# Altium PCB PCB1.PcbDoc
Units mm, origin at the board's own origin, x right, y up, seen from the top; angles counter-clockwise.
Board outline 71.5 x 84.25 mm, 2 copper layers (Top Layer, Bottom Layer), stack 1.569 mm thick; 17 components, 13 nets, 65 pads, 4 vias.
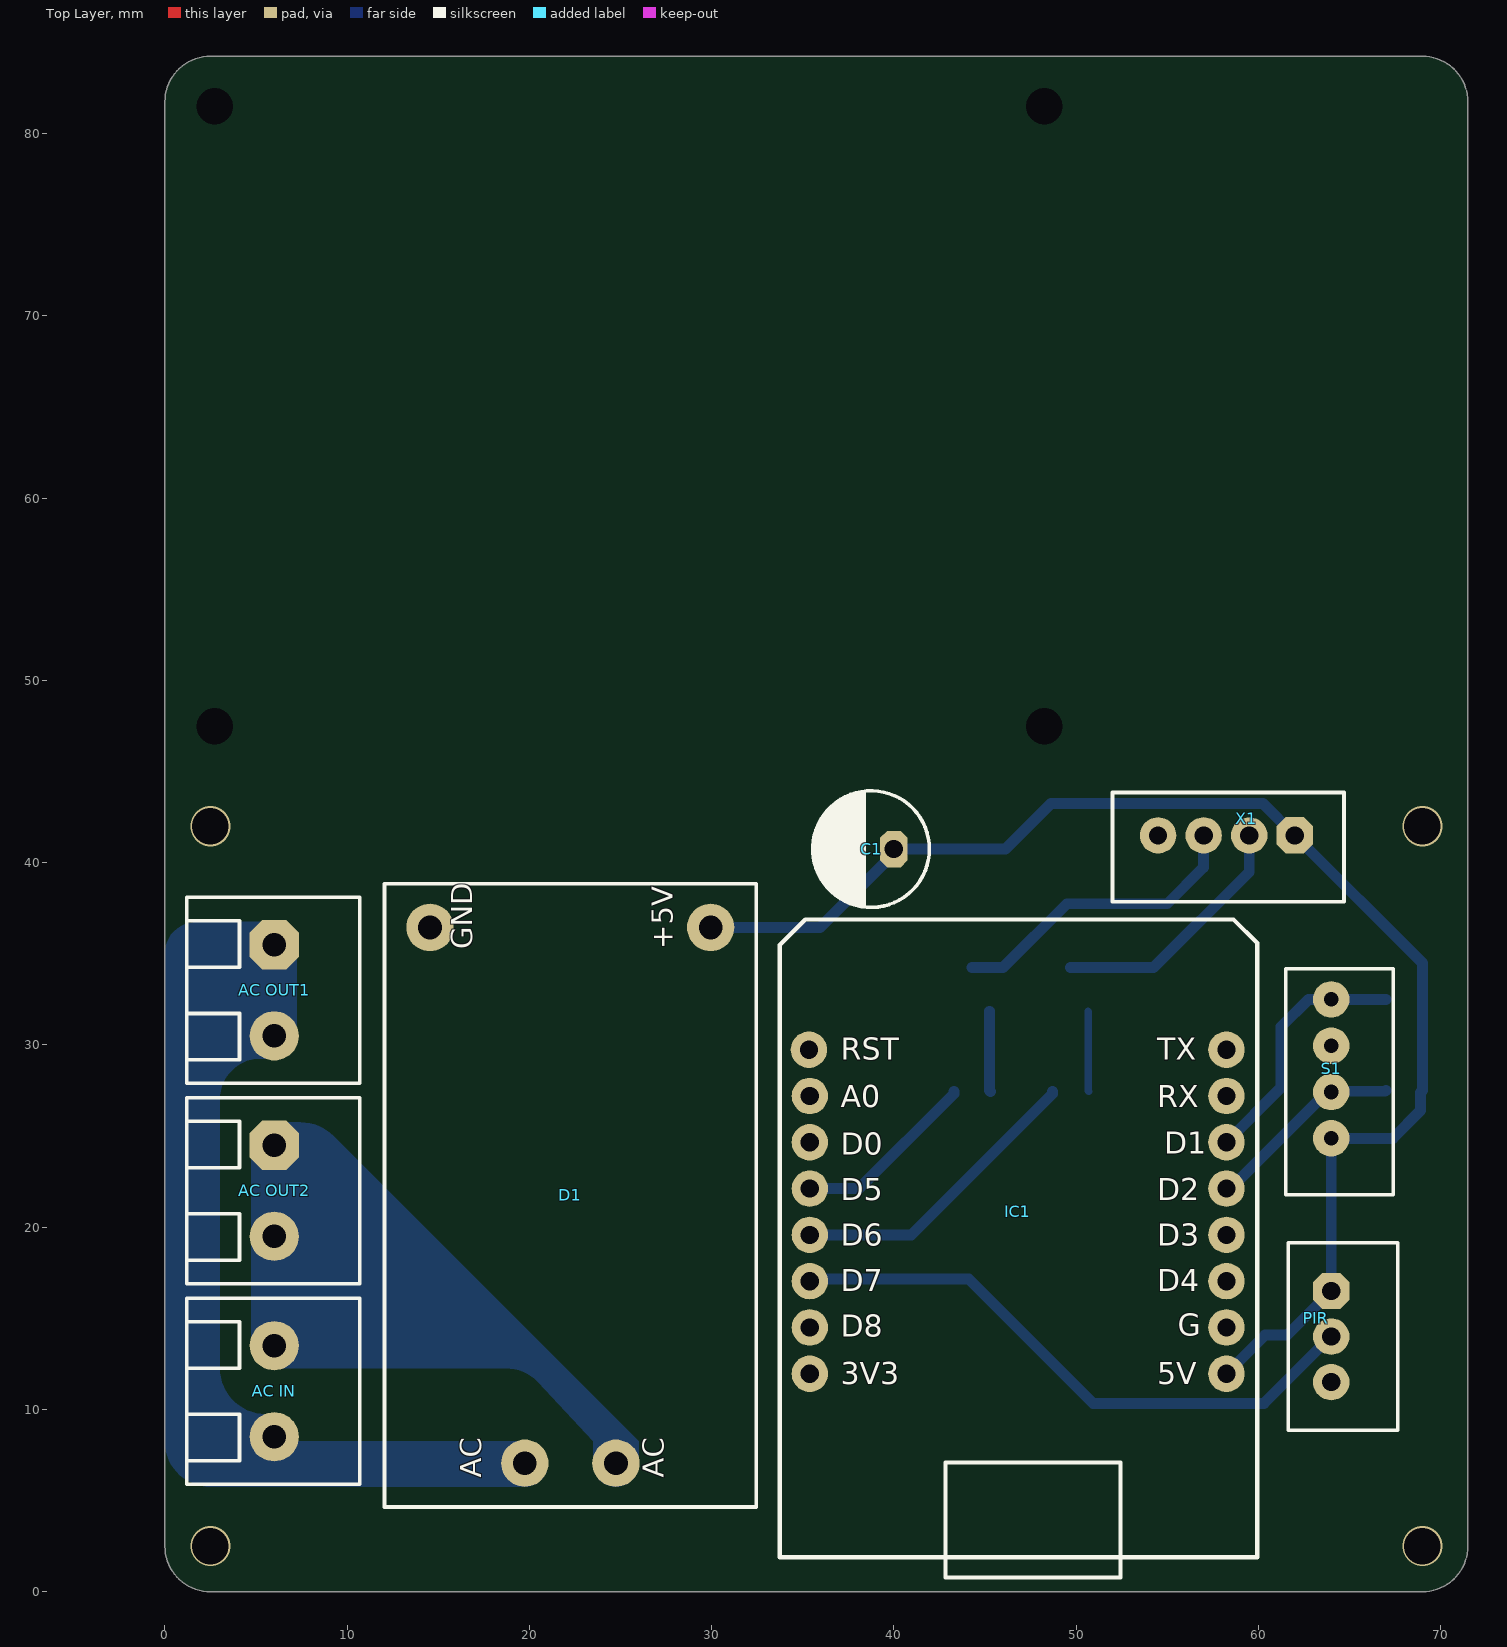
[diagram p0: Top Layer view]
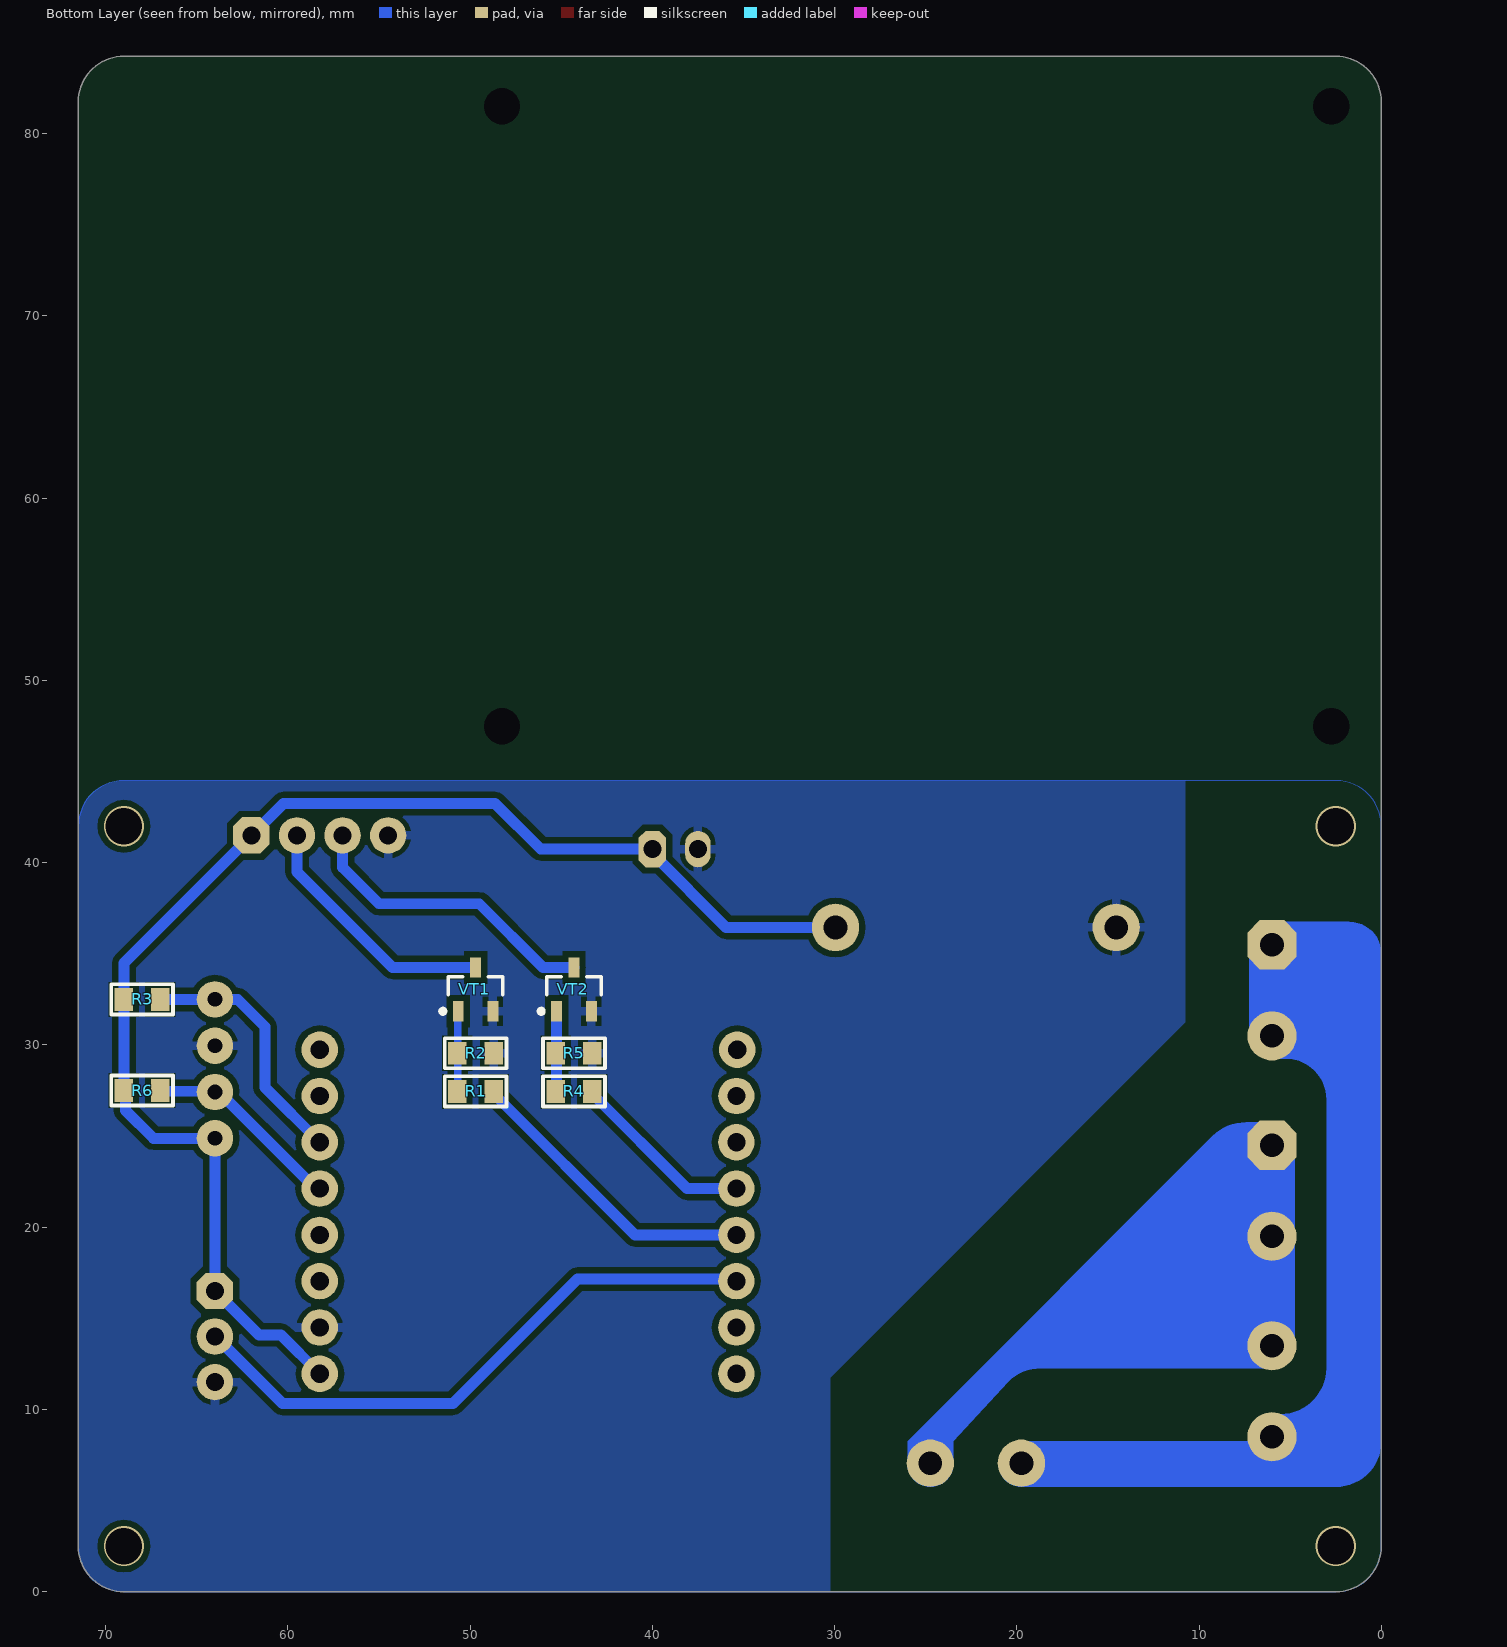
[diagram p1: Bottom Layer view, seen from below]
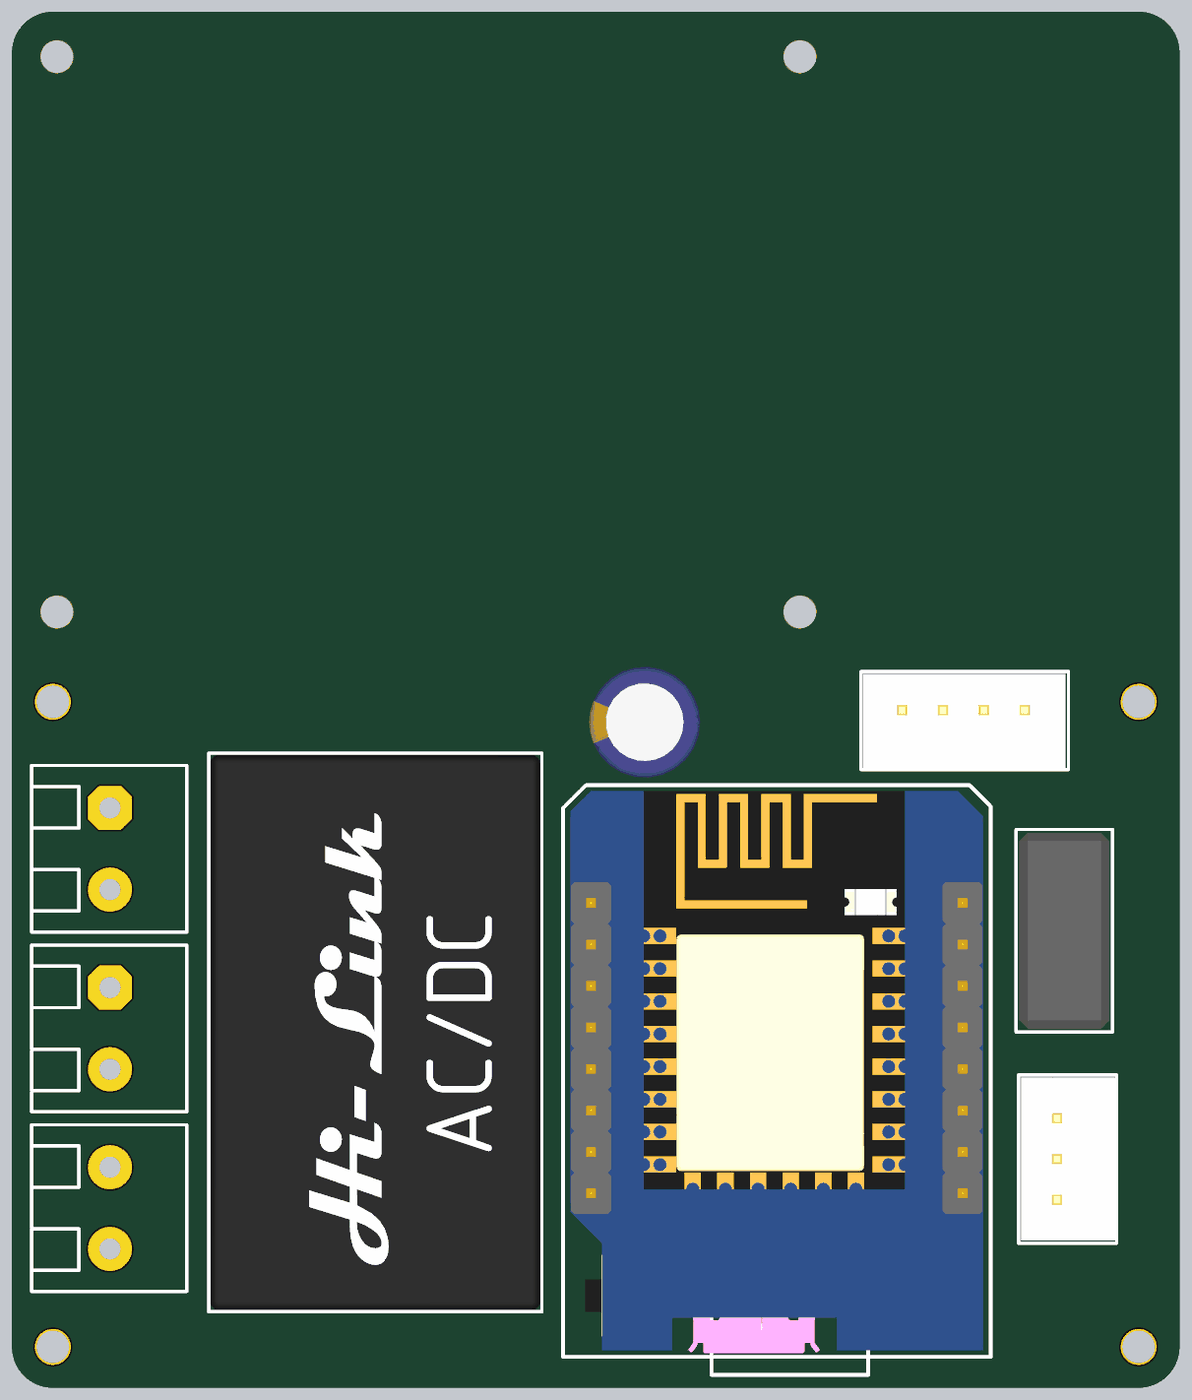
[diagram p2: 3D render of the assembled board from above, using the file's embedded part models]
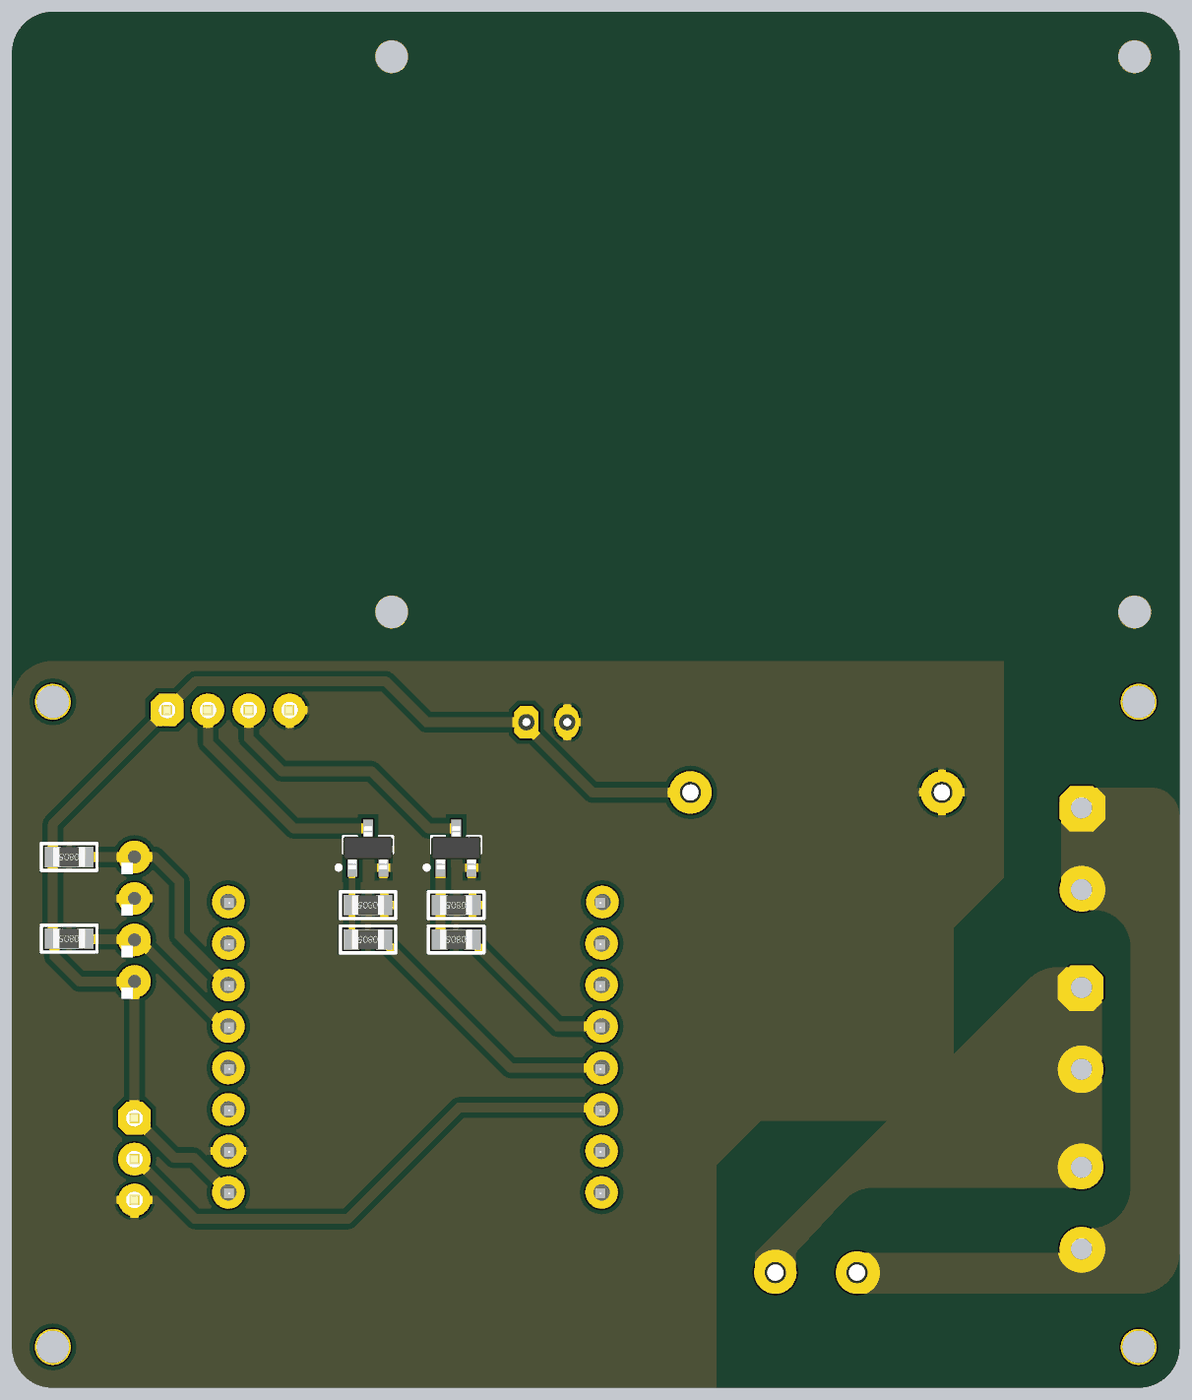
[diagram p3: 3D render of the assembled board from below, using the file's embedded part models]

## Layer stack, top to bottom
Top Solder: solder mask 0.0254, SM-001, Dk 4
Top Layer: signal copper 0.035
Dielectric 1: core 1.4986, Core-043, Dk 4.3
Bottom Layer: signal copper 0.035
Bottom Solder: solder mask 0.0254, SM-001, Dk 4

## Board outline
0,2.5 0,81.75 cw(c2.5,81.75) 2.5,84.25 69,84.25 cw(c69,81.75) 71.5,81.75 71.5,2.5 cw(c69,2.5) 69,0 2.5,0 cw(c2.5,2.5)

## Design rules (kind name [scope] priority, off if disabled: settings)
Clearance "High Voltage" [All vs InNetClass('AC')] p1: gap=1.4 ignorepadtopadclearanceinfootprint=FALSE
Clearance [All] p2: gap=0.33 ignorepadtopadclearanceinfootprint=FALSE
Height [All] p1: minheight=0 maxheight=50 prefheight=12.7
PolygonConnect [All] p1: connectstyle=Relief reliefconductorwidth=0.5 reliefentries=4 polygonreliefangle="90 Angle" airgapwidth=0.254
RoutingVias [All] p1: holewidth=0.711 width=1.27 viastyle="Through Hole" minholewidth=0.711 minwidth=1.27 maxholewidth=0.711 maxwidth=1.27
SolderMaskExpansion [All] p1: expansion=0.102 istentingtop=FALSE
Width [All] p1: maxlimit=1.2 minlimit=0.254 preferedwidth=0.3 minimp=50.000000 maximp=50.000000 favimp=50.000000
29 further rules are at their usual default settings.

## Classes and differential pairs
net class AC: AC1 AC2

## Components (designator, comment, footprint, x,y, rotation, side; value= is the part's Value field where it differs from the comment)
"AC IN" "Terminal connector, 2pin, 3.5mm, 300VAC, 10A" "CON: 0395430002 (5 mm)"#1 6,11 r270 top
"AC OUT1" "Terminal connector, 2pin, 3.5mm, 300VAC, 10A" "CON: 0395430002 (5 mm)"#2 6,33 r270 top
"AC OUT2" "Terminal connector, 2pin, 3.5mm, 300VAC, 10A" "CON: 0395430002 (5 mm)"#2 6,22 r270 top
C1 "Aluminium capacitor, 10μF, 25V, ±20%, 54mOhm, 14x10x5 mm, -55...+105°C" "CAP: D6.3C2.5H11" 38.75,40.75 r180 top value=10μF
D1 "AC/DC converter, isolator, 3V 900mA, 100...240VAC, -40...+105°C, 30x20x15mm" "MOD: HLK-PM01" 22.25,21.75 r90 top
IC1 "D1 mini" D1_mini 46.84,19.29 r0 top
PIR "Connector, 2pin, 2.54mm, 250VAC, 3A" "CON: CWF-3" 64,14 r270 top
R1 "Resistor film, 102, ±5%, 0805, 0.125W, -55...+125°C" "RES: 0805" 49.7,27.45 r0 bottom value=102
R2 "Resistor film, 103, ±5%, 0805, 0.125W, -55...+125°C" "RES: 0805" 49.7,29.55 r0 bottom value=103
R3 "Resistor film, 103, ±5%, 0805, 0.125W, -55...+125°C" "RES: 0805" 68,32.5 r0 bottom value=103
R4 "Resistor film, 102, ±5%, 0805, 0.125W, -55...+125°C" "RES: 0805" 44.3,27.45 r0 bottom value=102
R5 "Resistor film, 103, ±5%, 0805, 0.125W, -55...+125°C" "RES: 0805" 44.3,29.55 r0 bottom value=103
R6 "Resistor film, 103, ±5%, 0805, 0.125W, -55...+125°C" "RES: 0805" 68,27.5 r0 bottom value=103
S1 "AM2320" AM2320 64,24.88 r90 top
VT1 "NPN transistor, 45V, 100mA, 100MHz, 300mW, 0.6V, 420, SOT-23, -55...+125°C" SOT23 49.7,33.05 r90 bottom
VT2 "NPN transistor, 45V, 100mA, 100MHz, 300mW, 0.6V, 420, SOT-23, -55...+125°C" SOT23 44.3,33.05 r90 bottom
X1 "Connector, 4pin, 2.54mm, 250VAC, 3A" "CON: CWF-4" 64.75,43.875 r180 top

## Footprints (in the part's own frame and the unit in brackets; to place one, negate y for a bottom-side part, rotate by r counter-clockwise, add the part's x,y. Pads: shape width x height; smd on the part's side, far side on the other; paste and mask are expansions set on the pad)
AM2320 [mm]
  round 2 hole 0.8: 1(0,0) 2(2.54,0) 3(5.08,0) 4(7.62,0)
  silkscreen extent -3.1,-3.4 9.3,2.5, body extent -2.9,-3.2 9.1,2.3, height 15.75
"CAP: D6.3C2.5H11" [mm]
  oct 1.5x2 hole 1: 1(-1.25,0)
  oval 1.4x2 hole 1: 2(1.25,0)
  silkscreen extent -3.2,-3.2 3.2,3.2, body extent -3.4,-3.4 3.4,3.4, height 12.5
"CON: 0395430002 (5 mm)"#1 [mm] "2 pin 5.08mm screw connector"
  round 2.7 hole 1.3: 1(-2.5,0) 2(2.5,0)
  silkscreen extent -5.1,-4.8 5.1,4.7, body extent -5,-4.8 5,4.6, height 14.63
"CON: 0395430002 (5 mm)"#2 [mm] "2 pin 5.08mm screw connector"
  oct 2.7x2.7 hole 1.3: 1(-2.5,0)
  round 2.7 hole 1.3: 2(2.5,0)
  silkscreen extent -5.1,-4.8 5.1,4.7, body extent -5,-4.8 5,4.6, height 14.63
"CON: CWF-3" [mm]
  oct 2x2 hole 1: 1(-2.5,0)
  round 2 hole 1: 2(0,0) 3(2.5,0)
  round 0.5 on Mech1: ""(-4.5,-1.7)
  silkscreen extent -5.15,-2.35 5.15,3.65, body extent -5,-2.2 5,3.55, height 7
"CON: CWF-4" [mm]
  oct 2x2 hole 1: 1(2.75,2.375)
  round 2 hole 1: 2(5.25,2.375) 3(7.75,2.375) 4(10.25,2.375)
  round 0.5 on Mech1: ""(0.6,0.575)
  silkscreen extent 0.05,0.02 12.75,6.02, body extent 0.23,0.18 12.63,5.93, height 7
D1_mini [mm]
  round 2 hole 1: 1(-11.5,10.45) 2(-11.45,7.91) 3(-11.45,5.37) 4(-11.45,2.83) 5(-11.45,0.29) 6(-11.45,-2.25) 7(-11.45,-4.79) 8(-11.45,-7.33) 9(11.41,-7.33) 10(11.41,-4.79) 11(11.41,-2.25) 12(11.41,0.29) 13(11.41,2.83) 14(11.41,5.37) 15(11.41,7.91) 16(11.41,10.45)
  silkscreen extent -13.1,-18.5 13.1,17.6, body extent -12.65,-17.17 12.65,17.25, height 12.09
"MOD: HLK-PM01" [mm]
  round 2.6 hole 1.3: 1(-14.7,2.5) 2(-14.7,-2.5) 3(14.7,7.7) 4(14.7,-7.7)
  silkscreen extent -17.1,-10.2 17.1,10.2, body extent -17,-10.1 17,10.1, height 15.07
"RES: 0805" [mm]
  rect 1x1.25 smd: 1(-1,0) 2(1,0)
  silkscreen extent -1.7,-0.82 1.7,0.82, body extent -1,-0.6 1,0.6, height 0.44
SOT23 [mm]
  rect 1.1x0.6 smd: 1(-1.2,0.95) 2(-1.2,-0.95) 3(1.2,0)
  round 0.5 on Mech1: ""(-0.9,1.1)
  silkscreen extent -1.32,-1.5 0.7,1.92, body extent -1.32,-1.52 1.32,1.52, height 1.12

## Part data
"AC IN" "AC OUT1" "AC OUT2": library part Connector_terminal_2pin, CurrentMax=10A, Manufacturer=Degson, PartNumber=DG350-3.5-02P-14, VoltageMax=300VAC, CommentText="AC IN", HelpURL=https://www.chipdip.ru/product/dg350-3.5-02p-12, Multichannel=2pin, Pitch=3.5mm, TypeConnector="Terminal connector", ValueManufacturerPartNumber="Terminal connector, 2pin, 3.5mm, 300VAC, 10A"
C1: library part Aluminium, Manufacturer=Wurth, Package="14x10x5 mm", PartNumber=860080475013, Temperature=-55...+105°C, Tolerance=±20%, TypeCapacitor="Aluminium capacitor", Voltage=25V, HelpURL=https://www.digikey.com/product-detail/en/wurth-electronics-inc/860080475013/732-9029-1-ND/5728972, Impedance=54mOhm, ValueManufacturerPartNumber="Aluminium capacitor, 10μF, 25V, ±20%, 54mOhm, 14x10x5 mm, -55...+105°C"
D1: library part HLK-PM05, "AC/DC converter", InputVoltage=100...240VAC, Manufacturer=Mornsun, OutputVoltage="3V 900mA", Package=30x20x15mm, Temperature=-40...+105°C, ComponentType="AC/DC converter", HelpURL=https://ru.aliexpress.com/item/32408565688.html, OutputType=isolator, PartNumber=HLK-PM05, ValueManufacturerPartNumber="AC/DC converter, isolator, 3V 900mA, 100...240VAC, -40...+105°C, 30x20x15mm"
PIR: library part CWF-3, CurrentMax=3A, Manufacturer=Connfly, PartNumber=CWF-2R, VoltageMax=250VAC, CommentText="\"Разъем\"", HelpURL=https://www.chipdip.ru/product/cwf-2r-ds1069-2-mr, Multichannel=2pin, Pitch=2.54mm, TypeConnector=Connector, ValueManufacturerPartNumber="Connector, 2pin, 2.54mm, 250VAC, 3A"
R1 R2 R3 R4 R5 R6: library part Resistor_0805, Manufacturer=Yageo, Package=0805, PartNumber=RC0805JR-07100RL, Power=0.125W, Temperature=-55...+125°C, Tolerance=±5%, TypeResistor="Resistor film", HelpURL=https://www.digikey.com/product-detail/en/yageo/RC0805JR-07100RL/311-100ARCT-ND/731185
  R1 R4: ValueManufacturerPartNumber="Resistor film, 102, ±5%, 0805, 0.125W, -55...+125°C"
  R2 R3 R5 R6: ValueManufacturerPartNumber="Resistor film, 103, ±5%, 0805, 0.125W, -55...+125°C"
VT1 VT2: library part BJT_NPN_132, CurrentCE=100mA, CurrentGain=420, Frequency=100MHz, Manufacturer="ON Semiconductor", MaxPower=300mW, Package=SOT-23, PartNumber=KT3153A9, Temperature=-55...+125°C, VoltageCE=45V, VoltageSaturation=0.6V, HelpURL=https://www.digikey.com/product-detail/en/on-semiconductor/BC847CLT1G/BC847CLT1GOSCT-ND/917836, TypeTransistor="NPN transistor", ValueManufacturerPartNumber="NPN transistor, 45V, 100mA, 100MHz, 300mW, 0.6V, 420, SOT-23, -55...+125°C"
X1: library part CWF-4, CurrentMax=3A, Manufacturer=Connfly, PartNumber=CWF-4R, VoltageMax=250VAC, CommentText="\"Разъем\"", HelpURL=https://www.chipdip.ru/product/cwf-4r-ds1069-4-mr, Multichannel=4pin, Pitch=2.54mm, TypeConnector=Connector, ValueManufacturerPartNumber="Connector, 4pin, 2.54mm, 250VAC, 3A"

## Free pads (board coordinates)
  round 1.524 hole 2: 7(2.75,81.5) 8(2.75,47.5) 9(48.25,47.5) 10(48.25,81.5)

## Via types
v1: diameter 2.2, hole 2, Top Layer to Bottom Layer, 4 vias

## Nets (pads, with @x,y where several pads share a name; then routed paths per layer and width w, separated by ;. In a path a pad name is that pad's centre, name@x,y a point inside that pad or via, vN(x,y) a via of type N, cw(c..) or ccw(c..) an arc to the next point about the centre after c; other vN are vias at no path point)
+5: C1.1 D1.4 IC1.9 PIR.1 R3.2 R6.2 S1.1 X1.1 | length 75.3
  Bottom Layer w0.6: D1.4 35.95,36.45 40,40.5 C1.1 46.125,40.75 48.625,43.25 60.25,43.25 X1.1 69,34.5 R3.2 R6.2 68.901,27.401 68.901,26.401 67.38,24.88 S1.1 PIR.1 61.587,14.087 60.377,14.087 IC1.9
AC1: "AC IN.1" "AC OUT2.1" "AC OUT2.2" D1.2
AC2: "AC IN.2" "AC OUT1.1" "AC OUT1.2" D1.1
GND: C1.2 D1.3 IC1.10 PIR.3 R2.1 R5.1 S1.3 VT1.2 VT2.2 X1.4
NetR1_2: R1.2 R2.2 VT1.1 | length 4.4
  Bottom Layer w0.4: VT1.1 50.675,31.825 50.675,27.475 R1.2
NetR4_2: R4.2 R5.2 VT2.1 | length 4.4
  Bottom Layer w0.6: VT2.1 45.25,27.5 R4.2
NetVT1_3: VT1.3 X1.2 | length 14
  Bottom Layer w0.6: VT1.3 54.25,34.25 59.5,39.5 X1.2
NetVT2_3: VT2.3 X1.3 | length 16.7
  Bottom Layer w0.6: VT2.3 46,34.25 49.5,37.75 55,37.75 57,39.75 X1.3
PIR: IC1.6 PIR.2 | length 33
  Bottom Layer w0.6: IC1.6 35.51,17.16 44.111,17.16 50.941,10.33 60.3,10.33 63.97,14 PIR.2
Relay1: IC1.5 R1.1 | length 16.6
  Bottom Layer w0.6: IC1.5 40.955,19.58 48.7,27.325 R1.1
Relay2: IC1.4 R4.1 | length 10.2
  Bottom Layer w0.6: IC1.4 38.095,22.12 43.3,27.325 R4.1
SCL: IC1.14 R3.1 S1.4 | length 14
  Bottom Layer w0.6: IC1.14 61.25,27.66 61.25,31 62.75,32.5 R3.1
SDA: IC1.13 R6.1 S1.2 | length 11
  Bottom Layer w0.6: IC1.13 58.475,22.12 63.775,27.42 S1.2 64.04,27.46 66.96,27.46 R6.1
pads on no net: IC1.1 IC1.2 IC1.3 IC1.7 IC1.8 IC1.11 IC1.12 IC1.15 IC1.16 PIR. VT1. VT2. X1.
copper on no net:
  other v1: 2.5,2.5 69,2.5 2.5,42 69,42

## Polygon pours and split planes (outlines as drawn)
GND on Bottom Layer "NONET_L-01_P-001" (solid, pour order 1): 10.75,44.5 10.75,31.25 30.25,11.75 30.25,0 69,0 ccw(c69,2.5) 71.5,2.5 71.5,42 ccw(c69,42) 69,44.5
no net on Bottom Layer "NONET_L-01_P-001" (solid, shelved, pour order 0): 0,42 cw(c2.5,42) 2.5,44.5 69,44.5 cw(c69,42) 71.5,42 71.5,2.5 cw(c69,2.5) 69,0 2.5,0 cw(c2.5,2.5) 0,2.5

## Other copper
Bottom Layer:
  region net AC2: 19.75,8.25 cw(c19.75,7) 21,7 cw(c19.75,7) 19.75,5.75 2.5,5.75 cw(c2.5,8.25) 0,8.25 0,35 cw(c1.75,35) 1.75,36.75 6,36.75 cw(c6,35.5) 7.25,35.5 7.25,30.5 cw(c6,30.5) 6,29.25 5.25,29.25 ccw(c5.25,27) 3,27 3,12.29 ccw(c5.54,12.29) 5.54,9.75 6,9.75 cw(c6,8.5) 7.25,8.5 7.25,8.25
  region net AC1: 4.75,24.5 cw(c6,24.5) 6,25.75 7.448,25.75 cw(c7.448,23.21) 9.244,25.006 26,8.25 26,7 cw(c24.75,7) 24.75,5.75 cw(c24.75,7) 23.5,7 23.5,8.25 20.494,11.506 ccw(c18.698,9.71) 18.698,12.25 6,12.25 cw(c6,13.5) 4.75,13.5
  pour cut-out: 4.25,28
  region: -4.75,19

## Silkscreen, mask and mechanical layers (free items; w line width, h text height)
Border:
  lines w0.1: 71.5,81.75 ccw(c69,81.75) 69,84.25 2.5,84.25 ccw(c2.5,81.75) 0,81.75 0,2.5 ccw(c2.5,2.5) 2.5,0 69,0 ccw(c69,2.5) 71.5,2.5 71.5,81.75 ; 71.5,81.75 71.5,81.75

## Text inside footprints (layer, text, board x,y; h text height)
D1: Top Overlay "AC" at 17.75,6.25 h2 r90; Top Overlay "AC" at 27.75,6.25 h2 r90; Top Overlay "+5V" at 28.25,35.25 h2 r90; Top Overlay "GND" at 17.25,35.25 h2 r90
IC1: Top Overlay "TX" at 54.44,29.19 h1.2; Top Overlay "RX" at 54.44,26.59 h1.2; Top Overlay "D1" at 54.84,24.04 h1.2; Top Overlay "D2" at 54.44,21.49 h1.2; Top Overlay "D3" at 54.44,18.99 h1.2; Top Overlay "D4" at 54.44,16.49 h1.2; Top Overlay "G" at 55.59,14.04 h1.2; Top Overlay "5V" at 54.44,11.39 h1.2; Top Overlay "3V3" at 37.09,11.39 h1.2; Top Overlay "D8" at 37.09,13.99 h1.2; Top Overlay "D7" at 37.09,16.49 h1.2; Top Overlay "D6" at 37.09,18.99 h1.2; Top Overlay "D5" at 37.09,21.49 h1.2; Top Overlay "D0" at 37.09,23.99 h1.2; Top Overlay "A0" at 37.09,26.59 h1.2; Top Overlay "RST" at 37.09,29.19 h1.2